# Altium PCB Led-3V.PcbDoc
Units mm, origin at the board's own origin, x right, y up, seen from the top; angles counter-clockwise.
Board outline 47.25 x 28.25 mm, 2 copper layers (Top Layer, Bottom Layer); 14 components, 13 nets, 47 pads, 0 vias.
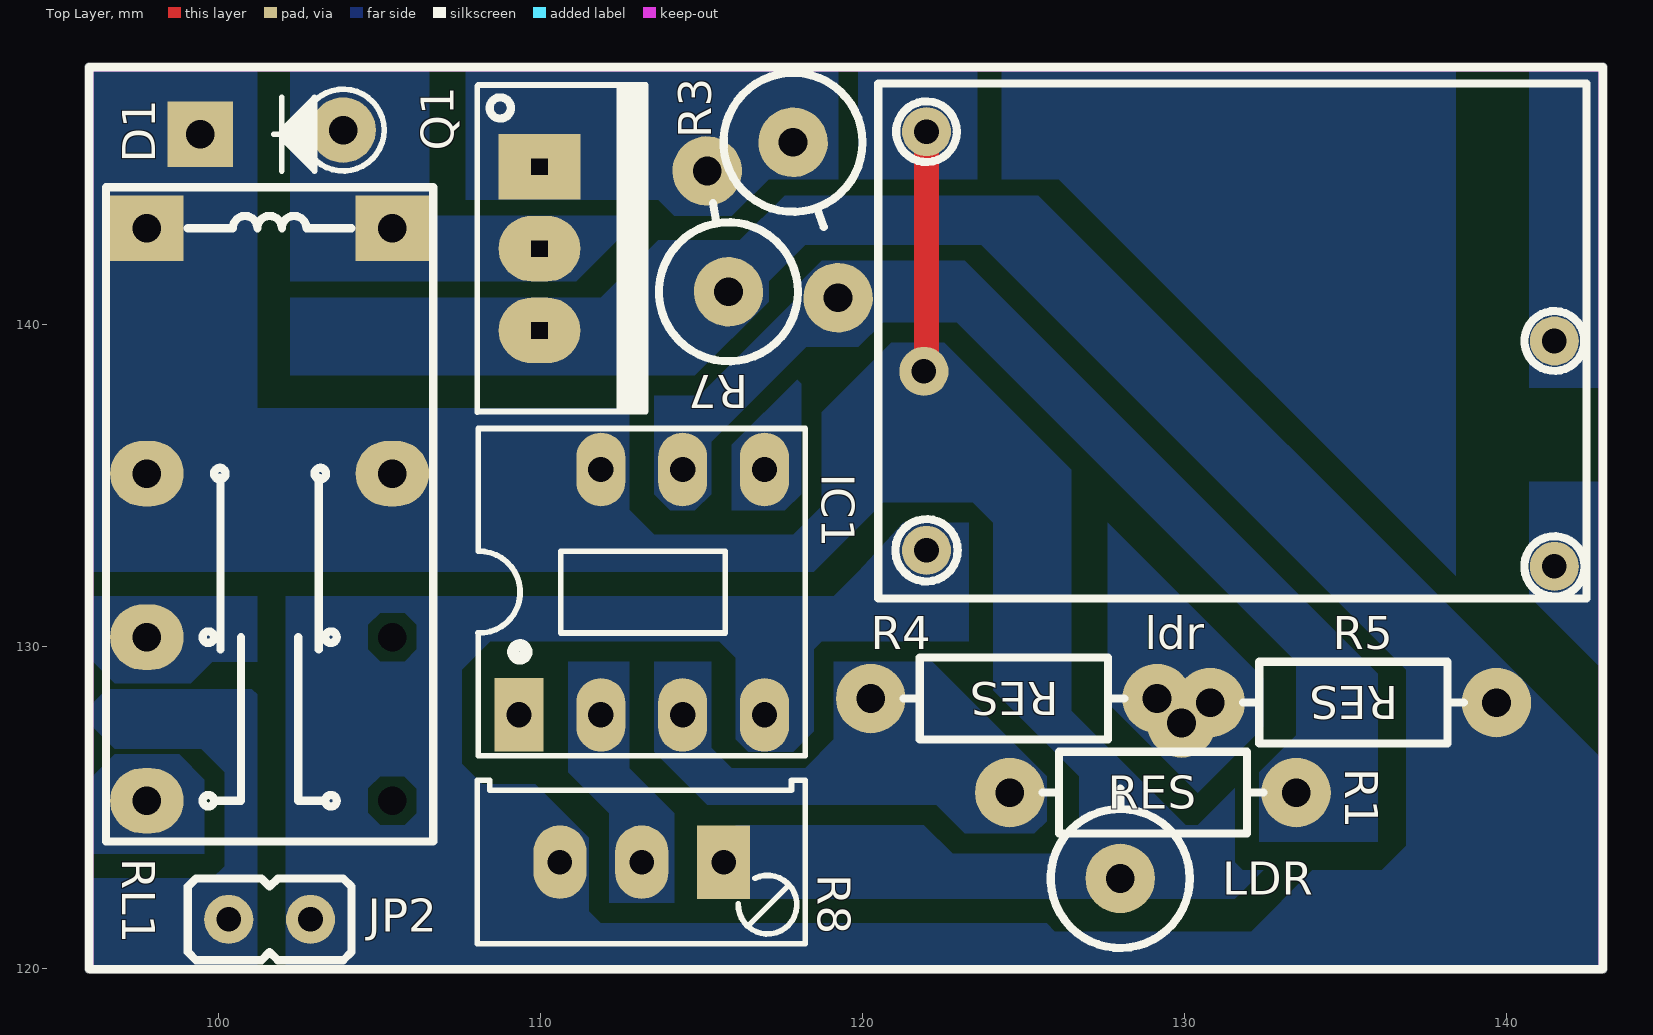
[diagram p0: Top Layer view]
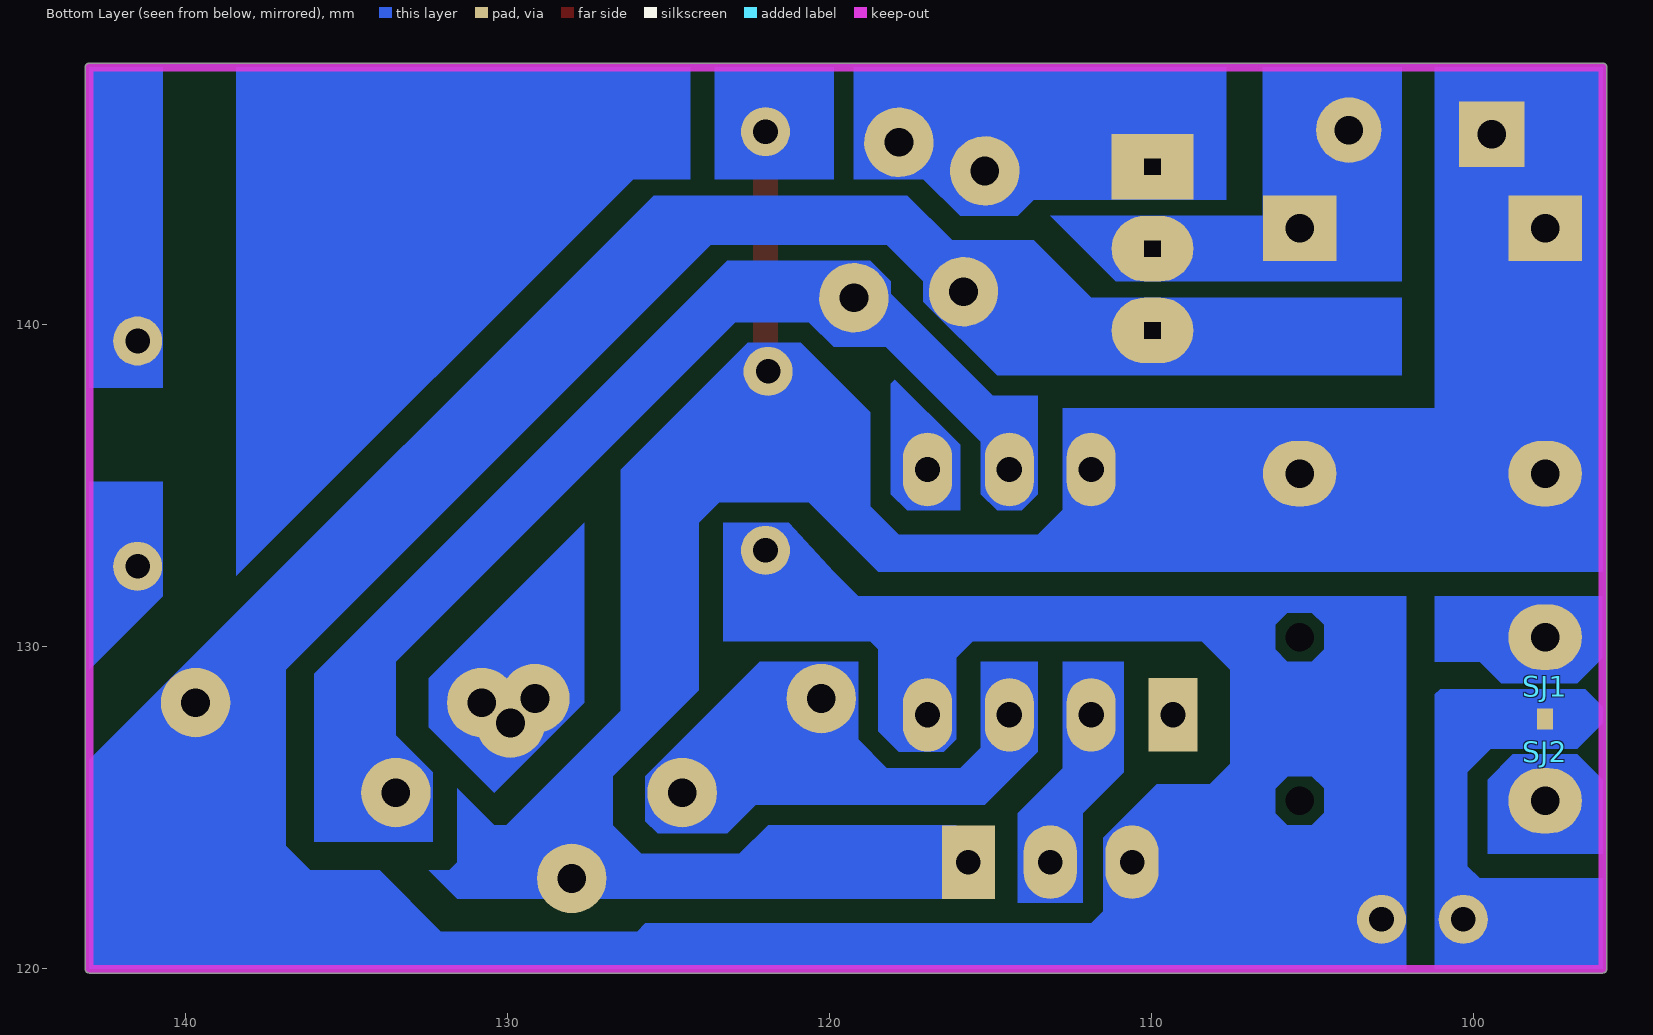
[diagram p1: Bottom Layer view, seen from below]
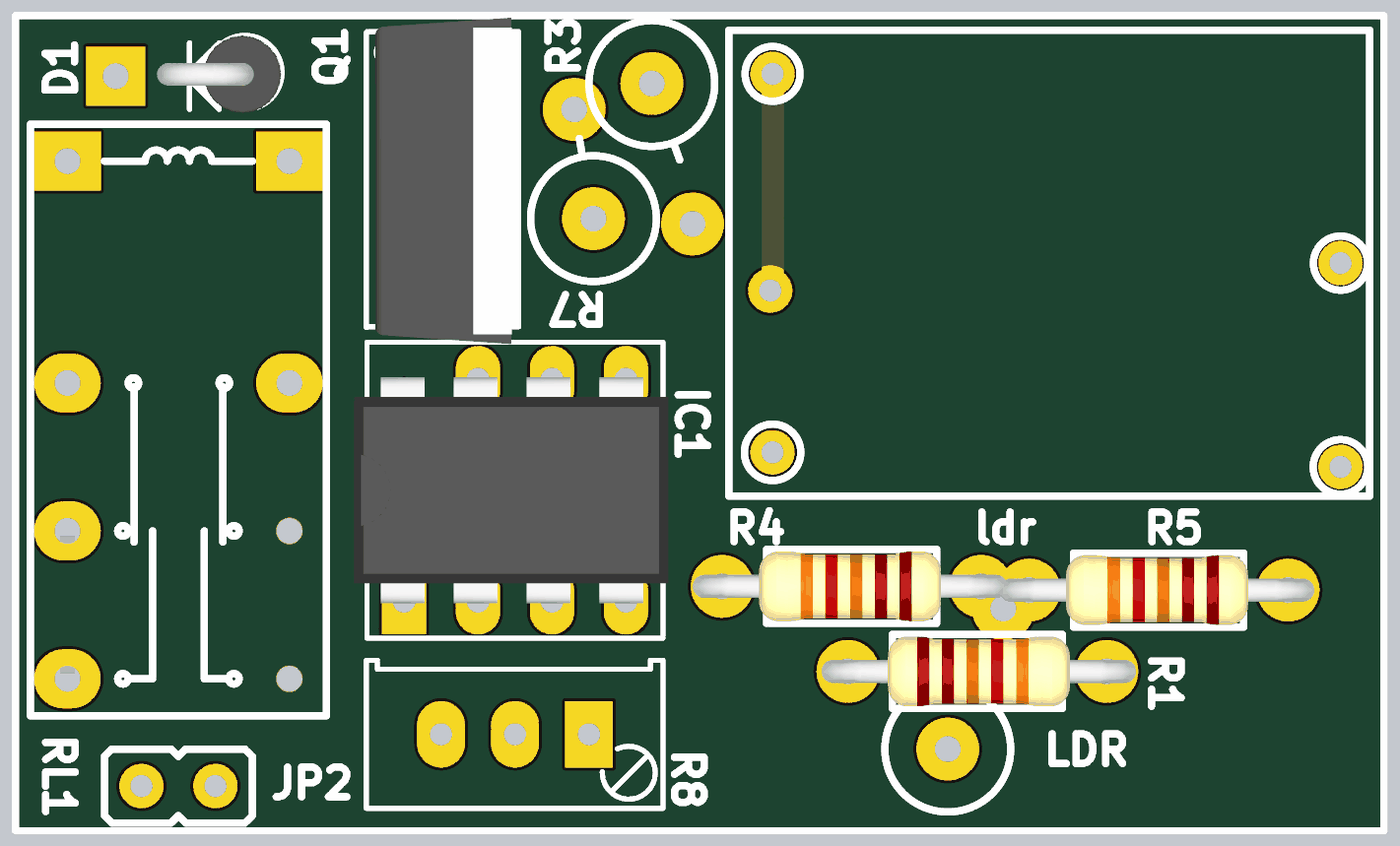
[diagram p2: 3D render of the assembled board from above, using the file's embedded part models]

## Layer stack, top to bottom
Top Solder: solder mask 0.0102, Solder Resist, Dk 3.5
Top Layer: signal copper 0.0356
Dielectric 1: dielectric 0.32, FR-4, Dk 4.8
Bottom Layer: signal copper 0.0356
Bottom Solder: solder mask 0.0102, Solder Resist, Dk 3.5

## Board outline
95.873,120 95.873,147.999 cw(c96,148) 96,148.127 143,148.127 cw(c143,148) 143.127,148 143.127,120 cw(c143,120) 143,119.873 96,119.873 cw(c96,120)

## Design rules (kind name [scope] priority, off if disabled: settings)
Clearance [All] p1: gap=0 ignorepadtopadclearanceinfootprint=FALSE
PolygonConnect [All] p1: connectstyle=Relief reliefconductorwidth=0.254 reliefentries=4 polygonreliefangle="90 Angle" airgapwidth=0.254
RoutingVias [All] p1: holewidth=0.711 width=1.27 viastyle="Through Hole" minholewidth=0.711 minwidth=1.27 maxholewidth=0.711 maxwidth=1.27
SolderMaskExpansion [All] p1: expansion=0.102
Width [All] p1: maxlimit=0.762 minlimit=0.508 preferedwidth=0.635 minimp=50.000000 maximp=50.000000 favimp=50.000000
30 further rules are at their usual default settings.

## Components (designator, comment, footprint, x,y, rotation, side; value= is the part's Value field where it differs from the comment)
D1 "Diode" "DIODE - VERTICAL" 102.553,145.987 r180 top
IC1 "lm741-2" LM741 113.157,131.699 r90 top
JP2 "JP_2" JP_2 101.6,121.539 r0 top
LDR "RES" RES_VERTICAL#1 128.016,122.809 r90 top
Q1 "IRF640" IRF640 109.982,142.367 r270 top
R1 "RES" RES 129.032,125.476 r0 top
R3 "RES" RES_VERTICAL#2 117.856,145.669 r290 top
R4 "RES" RES 124.714,128.397 r180 top
R5 "RES" RES 135.255,128.27 r180 top
R7 "RES" RES_VERTICAL#3 115.851,141.028 r100 top
R8 "POT_RES" POT_2 113.157,123.317 r180 top
RL1 "RYxW-K" RYxW-K 102.87,132.842 r0 top
SJ1 "Solderable Jump" S_JP_1 97.79,128.778 r90 bottom
SJ2 "Solderable Jump" S_JP_1 97.79,126.746 r270 bottom

## Footprints (in the part's own frame and the unit in brackets; to place one, negate y for a bottom-side part, rotate by r counter-clockwise, add the part's x,y. Pads: shape width x height; smd on the part's side, far side on the other; paste and mask are expansions set on the pad)
"DIODE - VERTICAL" [mil]
  round 80 hole 35: A(-52.5,-2.5)
  rect 80x80 hole 35: C(122.3,2.5)
  silkscreen extent -102,-52 33,48, body extent -101,-52 67,53, height 252
IRF640 [mm]
  oval 2.032x2.54 hole 0.5 square: D(0,0) S(2.54,0)
  rect 2.032x2.54 hole 0.5 square: G(-2.54,0)
  silkscreen extent -5.08,-1.93 5.08,3.3, body extent -5.56,-1.63 5.65,3.06, height 19.17
JP_2 [mil] "jump"
  round 60 hole 30: 1(-50,0) 2(50,0)
  silkscreen extent -100,-50 100,50
LM741 [mil]
  rect 90x60 hole 31: 1(-150,150)
  oval 90x60 hole 31: 2(-150,50) 3(-150,-50) 4(-150,-150) 5(150,-150) 6(150,-50) 7(150,50)
  round 0 all layers, no hole: 8(150,150)
  silkscreen extent -200,-200 200,200, body extent -153,-208 153,218, height 177
POT_2 [mil]
  rect 65x90 hole 30: 1(-100,0)
  oval 65x90 hole 30: 2(0,0) 3(100,0)
  silkscreen extent -200,-100 201,100, body extent -191,-98 191,90, height 430
RES [mil]
  round 85 hole 35: 1(-175,0) 2(175,0)
  silkscreen extent -135,-50 135,50, body extent -211,-47 215,47, height 111
RES_VERTICAL#1 [mil]
  round 85 hole 35: 1(0,0) 2(190,-75)
  silkscreen extent -85,-85 110,85
RES_VERTICAL#2 [mil]
  round 85 hole 35: 1(0,0) 2(197.35,-13.3)
  silkscreen extent -85,-85 110,85
RES_VERTICAL#3 [mil]
  round 85 hole 35: 1(0,0) 2(150,0)
  silkscreen extent -85,-85 110,85
RYxW-K [mil] "Relay"
  rect 90x80 hole 35: 1(-200,400) 8(100,400)
  oval 90x80 hole 35: 2(-200,100) 3(-200,-100) 4(-200,-300) 7(100,100)
  round 0 hole 35: 5(100,-300) 6(100,-100)
  silkscreen extent -250,-350 150,450
S_JP_1 [mm]
  rect 0.5x0.5 smd: 1(-1.087,0) 2(1.088,0)
  Top Layer region: -0.087,1 -0.47,0.924 -0.795,0.707 -1.011,0.383 -1.087,0 -1.087,0 -1.011,-0.383 -0.795,-0.707 -0.47,-0.924 -0.087,-1 -0.087,-1
  Top Layer region: 0.088,1 0.47,0.924 0.795,0.707 1.011,0.383 1.088,0 1.088,0 1.011,-0.383 0.795,-0.707 0.47,-0.924 0.088,-1 0.088,-1

## Part data
LDR R1 R3 R4 R5 R7: "di?n tr? size nh?"
Q1: "Transistor MOSFET N-channel"
R8: "Potentiometer"

## Free pads (board coordinates)
  round 1.524 hole 0.762: 2(141.5,132.5) 3(141.5,139.5) 4(122,133) 5(121.92,138.557) 5(122,146)

## Nets (pads, with @x,y where several pads share a name; then routed paths per layer and width w, separated by ;. In a path a pad name is that pad's centre, name@x,y a point inside that pad or via, vN(x,y) a via of type N, cw(c..) or ccw(c..) an arc to the next point about the centre after c; other vN are vias at no path point)
+12: D1.C IC1.7 LDR.1 pad.5 R8.1 RL1.1 RL1.2 | length 78.8
  Top Layer w0.762: pad.5@121.92,138.557 122,138.637 pad.5@122,146
  Bottom Layer w0.762: D1.C 97.79,144.267 RL1.1 RL1.2 100.076,133.096 107.569,133.096 109.982,135.509 IC1.7 111.887,134.62 113.411,133.096 118.364,133.096 120.904,135.636 121.92,135.636 ; R8.1 121.158,123.317 121.666,122.809 127.254,122.809 LDR.1@127.635,122.428 ; pad.5@121.92,138.557 121.92,135.636 ; LDR.1 128.016,125.476 125.222,128.27 125.222,133.858 123.444,135.636 121.92,135.636
AC+: pad.3
AC-: pad.2 | length 0
  Bottom Layer w0.762: pad.2@141.478,132.478 pad.2
GND: IC1.4 JP2.2 pad.4 Q1.S R5.1 R7.1 R8.3 | length 111.7
  Bottom Layer w0.762: JP2.2 108.839,121.539 R8.3@110.49,123.19 ; Q1.S 114.65,139.827 R7.1 118.079,143.256 124.597,143.256 R5.1 139.7,122.555 137.907,120.762 111.775,120.762 110.49,122.047 R8.3@110.49,123.19 ; R8.3@110.236,123.317 109.728,123.317 106.489,126.555 106.489,129.476 107.95,130.937 118.364,130.937 ; R8.3 R8.3@110.49,123.19 ; IC1.4 116.967,129.54 118.364,130.937 ; pad.4 119.937,130.937 118.364,130.937
LAMP: JP2.1 SJ1.1 SJ2.1 | length 10
  Bottom Layer w0.762: 97.79,128.27 100.838,128.27 100.838,122.047 JP2.1
NetD1_A: D1.A Q1.D RL1.8 | length 8.5
  Bottom Layer w0.762: D1.A 105.41,144.526 RL1.8 106.045,142.367 Q1.D
NetIC1_2: IC1.2 R8.2 | length 5.5
  Bottom Layer w0.762: IC1.2 111.887,126.238 113.157,124.968 R8.2 R8.2@112.903,123.571
NetIC1_3: IC1.3 R1.1 R4.2 | length 15
  Bottom Layer w0.762: IC1.3 114.427,127 115.824,125.603 118.618,125.603 120.269,127.254 R4.2 121.666,128.397 124.46,125.603 R1.1@124.46,125.095
NetIC1_6: IC1.6 R1.2 R3.2 | length 31.6
  Bottom Layer w0.762: IC1.6 114.427,136.017 R3.2 123.063,140.843 134.366,129.54 134.366,126.365 R1.2
NetLDR_2: LDR.2 R4.1 R5.2
NetQ1_G: Q1.G R3.1 R7.2 | length 8.3
  Bottom Layer w0.762: Q1.G 115.062,144.907 R7.2 116.078,145.669 R3.1
NetRL1_3: RL1.3 SJ1.2
NetRL1_4: RL1.4 SJ2.2
pads on no net: IC1.1 IC1.5 IC1.8 RL1.5 RL1.6 RL1.7

## Keep-outs
Keep-Out Layer:
  lines w0.254: 96,148 96,148 ; 96,148 96,120 143,120 143,140.589 143,148 96,148

## Other copper
Bottom Layer:
  region net +12: 105.537,136.652 cw(c105.537,135.382) 106.807,135.382 cw(c105.537,135.382) 105.537,134.112 105.283,134.112 cw(c105.283,135.382) 104.013,135.382 cw(c105.283,135.382) 105.283,136.652
  region net GND: 105.929,125.984 105.029,125.984 104.648,125.603 104.648,127.381
  region net GND: 104.648,125.73 104.648,124.206 104.521,124.079 103.378,125.222 102.108,125.222 102.108,126.746 103.124,127.762 105.156,127.762
  region net GND: 106.172,125.709 106.172,124.46 106.68,124.968 106.807,124.968
  region net GND: 106.299,120 102.108,120 102.108,125.222 104.267,125.222 105.029,124.46 105.791,124.46 106.671,125.34
  region net GND: 105.029,129.54 104.648,129.921 104.648,130.683 105.029,131.064 105.029,131.572 102.108,131.572 102.108,126.746 105.029,126.746
  region net GND: 104.775,127 106.299,125.476 106.299,120 143,120 143,126.494 140.97,128.524 125.476,144.018 122.809,144.018 117.602,144.018 116.205,142.621 113.665,142.621 111.887,140.843 102.235,140.843 102.235,138.43 113.411,138.43 114.808,138.43 117.094,140.716 117.094,140.967 117.094,141.351 118.237,142.494 123.698,142.494 136.906,129.286 136.906,123.825 136.144,123.063 133.985,123.063 132.08,121.158 125.984,121.158 125.73,121.412 111.887,121.412 111.506,121.793 111.506,124.079 109.855,125.73 108.204,125.73 107.569,126.365 107.569,129.286 108.458,130.175 115.57,130.175 116.078,129.667 116.078,127.127 116.459,126.746 117.856,126.746 118.491,127.381 118.491,129.921 118.745,130.175 123.317,130.175 123.317,133.858 121.285,133.858 119.888,132.334 119.126,131.572 105.029,131.572 105.029,131.064 105.791,131.064 106.172,130.683 106.172,129.921 105.791,129.54 104.775,129.54
  region net NetIC1_6: 113.538,134.747 114.046,134.239 114.808,134.239 115.316,134.747 115.316,136.398 118.237,139.319 119.888,139.319 120.65,140.081 122.936,140.081 133.477,129.54 133.477,127.254 132.334,126.111 132.334,123.952 136.017,123.952 136.017,129.159 123.19,141.986 118.745,141.986 118.11,141.351 118.11,140.97 114.935,137.795 113.538,137.795
  region net NetD1_A: 102.235,141.351 111.125,141.351 113.157,143.383 106.553,143.383 106.553,148 102.235,148
  region net NetQ1_G: 113.665,143.891 114.173,143.383 115.951,143.383 117.094,144.526 119.253,144.526 119.253,148 107.696,148 107.696,143.891
  region net +12: 96.79,126.833 96,127.623 96,128.143 96.548,128.691 101.052,128.691 101.219,128.524 101.219,120 96,120 96,122.809 99.822,122.809 100.203,123.19 100.203,126.111 99.481,126.833
  region net NetRL1_4: 96.79,126.658 96,125.869 96,123.571 99.568,123.571 99.568,125.88 98.79,126.658
  region net NetRL1_3: 99.822,129.54 101.219,129.54 101.219,131.572 96.012,131.572 96.012,129.644 96.79,128.866 99.148,128.866
  region net AC-: 143,131.191 143.002,135.128 140.716,135.128 140.716,131.572 143,129.288
  region net +12: 131.572,122.174 132.461,123.063 131.826,123.063 131.572,123.317 131.572,125.603 130.429,124.46 130.048,124.46 126.492,128.016 126.492,135.509 122.555,139.446 120.904,139.446 118.745,137.287 118.745,134.366 117.856,133.477 112.776,133.477 112.776,137.414 101.219,137.414 101.219,148 96,148 96,132.334 118.491,132.334 120.65,134.493 123.444,134.493 124.079,133.858 124.079,128.651 126.746,125.984 126.746,124.46 125.857,123.571 122.809,123.571 121.92,124.46 116.078,124.46 116.078,122.174
  region net AC+: 140.716,138.049 143.002,138.049 143.002,148 140.716,148
  region: 124.333,148 124.333,144.526 126.111,144.526 138.43,132.207 138.43,148
  region net NetLDR_2: 130.429,125.476 132.461,127.508 132.461,129.032 127.635,133.858 127.635,128.27
  region net NetIC1_3: 113.538,129.54 115.316,129.54 115.316,126.873 115.951,126.238 118.237,126.238 119.126,127.127 119.126,129.54 122.174,129.54 125.73,125.984 125.73,124.587 125.349,124.206 123.19,124.206 122.301,125.095 115.189,125.095 113.538,126.746
  region net NetIC1_2: 110.871,129.54 112.776,129.54 112.776,126.238 114.173,124.841 114.173,122.047 112.141,122.047 112.141,124.841 110.871,126.111
  region net +12: 119.888,147.999 119.888,144.526 123.571,144.526 123.571,147.999
  region: 115.951,134.239 117.602,134.239 118.11,134.747 118.11,138.176 117.983,138.303 115.951,136.271
  region: 111.887,136.652
  region: 104.013,127.508
  region: 99.695,128.524
  region: 96.266,126.619

## Silkscreen, mask and mechanical layers (free items; w line width, h text height)
Top Overlay:
  circle w0.254: c141.5,139.5 r0.929
  circle w0.254: c141.5,132.5 r0.937
  circle w0.254: c122,133 r0.968
  circle w0.254: c122,146 r0.942
  lines w0.254: 96,120 96,148 143,148 143,120 96,120 ; 120.5,131.5 120.5,147.5 142.5,147.5 142.5,131.5 120.5,131.5
  text "ldr" at 128.778,129.921 h1.02